# EAGLE board DIYBMSv4 (EAGLE 9.4.2)

Size 160 x 100 mm. Coordinates in mm from the lower left corner, seen from the top.
Outline: 0,0 160,0 160,100 0,100 0,0
Copper layers (1*16): Top 0.035mm / dielectric 1.5mm / Bottom 0.035mm
Design rules "default": minimum track width 6mil, minimum drill 0.35mm, track to track 6mil, track to pad 6mil, pad to pad 6mil, via to via 6mil, smd to smd 6mil, copper to edge 40mil, drill to drill 6mil, minimum pad ring 10mil, minimum via ring 8mil, stop-mask expansion 4mil, vias tented up to drill 0mil, thermal gap 10mil

## Footprints (pad centres in the part's own frame; a part is rotated, then mirrored left to right if it is on the bottom)
C1206K = smd 1.5 x 2: 1 -1.5,0; 2 1.5,0
LED_3MM = drill 0.813 pad 1.88: A -1.27,0; K 1.27,0
SOIC14N = smd 0.66 x 2.2: 1 -3.81,-3; 2 -2.54,-3; 3 -1.27,-3; 4 0,-3; 5 1.27,-3; 6 2.54,-3; 7 3.81,-3; 8 3.81,3; 9 2.54,3; 10 1.27,3; 11 0,3; 12 -1.27,3; 13 -2.54,3; 14 -3.81,3
DBZ_R-PDSO-G3 = smd 0.7 x 1: 1 -0.95,-1.1; 2 0.95,-1.1; 3 0,1.1
2X3-SHROUDED = drill 1.016 pad 1.88 square: 1 -1.27,2.54 | drill 1.016 pad 1.88 octagon: 2 1.27,2.54; 3 -1.27,0; 4 1.27,0; 5 -1.27,-2.54; 6 1.27,-2.54
1X05_LOCK = drill 1.016 pad 1.88: 1 0,0.127; 2 2.54,-0.127; 3 5.08,0.127; 4 7.62,-0.127; 5 10.16,0.127
1X02_LOCK = drill 1.016 pad 1.88: 1 -0.178,0; 2 2.718,0
DIL04 = drill 0.813 offset: 1 -1.27,-3.81; 2 1.27,-3.81; 3 1.27,3.81; 4 -1.27,3.81
SOT-23 = smd 1 x 1.4: 1 -0.95,-1.1; 2 0.95,-1.1; 3 0,1.1
R1206 = smd 1.6 x 1.803: 1 -1.422,0; 2 1.422,0
R2512 = smd 1.8 x 3.2: 1 -2.8,0; 2 2.8,0

## Placement (x,y rotation side)
C1  104  [C1206K]  -35.56,44.45 0 top  (outside the outline)
C2  2.2uF  [C1206K]  -30.48,44.45 0 top  (outside the outline)
C3  10uF  [C1206K]  -45.72,-21.59 0 top  (outside the outline)
D1  blue  [LED_3MM]  -15.24,31.75 0 top  (outside the outline)
D2  green  [LED_3MM]  -20.32,31.75 0 top  (outside the outline)
D3  RED  [LED_3MM]  -45.72,-88.9 0 top  (outside the outline)
IC1  ATTINY441/841-SSU  [SOIC14N]  -33.02,8.89 0 top  (outside the outline)
IC2  LM4040BIM3-2.0/NOPB 2.048v SOT23-3  [DBZ_R-PDSO-G3]  -45.72,24.13 0 top  (outside the outline)
J1  AVRISP6_SHROUDED  [2X3-SHROUDED]  -21.59,10.16 0 top  (outside the outline)
J2  [1X05_LOCK]  -25.4,49.53 0 top  (outside the outline)
J3  [1X02_LOCK]  -55.88,-114.3 0 top  (outside the outline)
J4  [1X02_LOCK]  -55.88,-118.11 0 top  (outside the outline)
OK1  PC817  [DIL04]  -53.34,-91.44 0 top  (outside the outline)
Q1  IRLML6244TRPBF  [SOT-23]  -34.29,-8.89 0 top  (outside the outline)
R1  10K  [R1206]  -33.02,38.1 0 top  (outside the outline)
R2  475K1%  [R1206]  -19.05,38.1 0 top  (outside the outline)
R3  402K1%  [R1206]  -27.94,38.1 0 top  (outside the outline)
R4  10K  [R1206]  -38.1,38.1 0 top  (outside the outline)
R5  SDNT2012X473F4150FTF  [R1206]  -44.45,31.75 0 top  (outside the outline)
R6  47k  [R1206]  -43.18,38.1 0 top  (outside the outline)
R7  2K2  [R1206]  -15.24,44.45 0 top  (outside the outline)
R8  2K2  [R1206]  -20.32,44.45 0 top  (outside the outline)
R9  1K  [R1206]  -25.4,44.45 0 top  (outside the outline)
R10  510R  [R1206]  -43.18,-6.35 0 top  (outside the outline)
R11  47k  [R1206]  -38.1,-15.24 0 top  (outside the outline)
R12  2R2  [R2512]  -43.18,-27.94 0 top  (outside the outline)
R13  2R2  [R2512]  -43.18,-35.56 0 top  (outside the outline)
R14  2R2  [R2512]  -43.18,-43.18 0 top  (outside the outline)
R15  2R2  [R2512]  -43.18,-50.8 0 top  (outside the outline)
R16  2R2  [R2512]  -43.18,-58.42 0 top  (outside the outline)
R17  2R2  [R2512]  -43.18,-66.04 0 top  (outside the outline)
R18  2R2  [R2512]  -43.18,-73.66 0 top  (outside the outline)
R19  2R2  [R2512]  -43.18,-81.28 0 top  (outside the outline)
R20  2K2  [R1206]  -44.45,-95.25 0 top  (outside the outline)
R21  220R  [R1206]  -54.61,-101.6 0 top  (outside the outline)
R22  220R  [R1206]  -54.61,-107.95 0 top  (outside the outline)

## Library data of the parts
C1-C3 = rcl; SPICEPREFIX: C
D1-D3 = SparkFun-LED; PROD_ID: DIO-08794
IC1 J1 = bt_avr
IC2 = texas; MPN: LM4041A12IDBZR; OC_FARNELL: 1407949; OC_NEWARK: 58K5875
J2-J4 = SparkFun-Connectors
OK1 = optocoupler; MPN: PC817X4J000F; OC_FARNELL: 9707727; OC_NEWARK: 97K7059
Q1 = tritiled
R1-R22 = rcl; SPICEPREFIX: R

## Nets
2_VOLT: C2.1 IC1.13 IC2.1 J2.2 R5.1 R9.2
DUMP_LOAD_ENABLE: IC1.10 R10.1
ENABLE: IC1.6 J2.4 R2.1 R9.1
GND: C1.2 C2.2 C3.2 IC1.14 IC2.2 J1.6 J2.5 OK1.2 Q1.2 R3.2 R4.2 R6.2 R7.1 R8.1 R11.2 R22.1
INPUT1: IC1.5 R2.2 R3.1
MISO/TXD1: D1.A IC1.8 J1.1
MOSI: D2.A IC1.7 J1.4
N$1: C3.1 Q1.1 R10.2 R11.1
N$2: D2.K R8.2
N$3: D1.K R7.2
N$4: R13.2 R14.1
N$5: R12.2 R15.1
N$6: R15.2 R17.1
N$7: R14.2 R16.1
N$8: R16.2 R18.1
N$9: R17.2 R19.1
N$10: Q1.3 R12.1 R13.1 R20.1
N$11: D3.K R20.2
N$12: OK1.1 R21.2
PB_0: IC1.2 J2.1 R4.1
PB_1: IC1.3 J2.3
RESET: IC1.4 J1.5 R1.1
RXD0: IC1.11 J4.2 R22.2
SCK/RXD1: IC1.9 J1.3 R5.2 R6.1
TX1LOAD: J3.2 OK1.3
TX1VCC: J3.1 OK1.4
TXD0: IC1.12 R21.1
VCC: C1.1 D3.A IC1.1 J1.2 J4.1 R1.2 R18.2 R19.2

## Tracks (layer width: path | path; a pad name or v marks a point on that pad's centre or on a via)
2_VOLT  (5 unrouted)
DUMP_LOAD_ENABLE  (1 unrouted)
ENABLE  (3 unrouted)
GND  (15 unrouted)
INPUT1  (2 unrouted)
MISO/TXD1  (2 unrouted)
MOSI  (2 unrouted)
N$1  (3 unrouted)
N$2  (1 unrouted)
N$3  (1 unrouted)
N$4  (1 unrouted)
N$5  (1 unrouted)
N$6  (1 unrouted)
N$7  (1 unrouted)
N$8  (1 unrouted)
N$9  (1 unrouted)
N$10  (3 unrouted)
N$11  (1 unrouted)
N$12  (1 unrouted)
PB_0  (2 unrouted)
PB_1  (1 unrouted)
RESET  (2 unrouted)
RXD0  (2 unrouted)
SCK/RXD1  (3 unrouted)
TX1LOAD  (1 unrouted)
TX1VCC  (1 unrouted)
TXD0  (1 unrouted)
VCC  (7 unrouted)